# Altium PCB L-D5019-08.PcbDoc
Units mm, origin at the board's own origin, x right, y up, seen from the top; angles counter-clockwise.
Board outline 37 x 36 mm, 2 copper layers (Top Layer, Bottom Layer), stack 1.57 mm thick; 44 components, 30 nets, 136 pads, 23 vias.
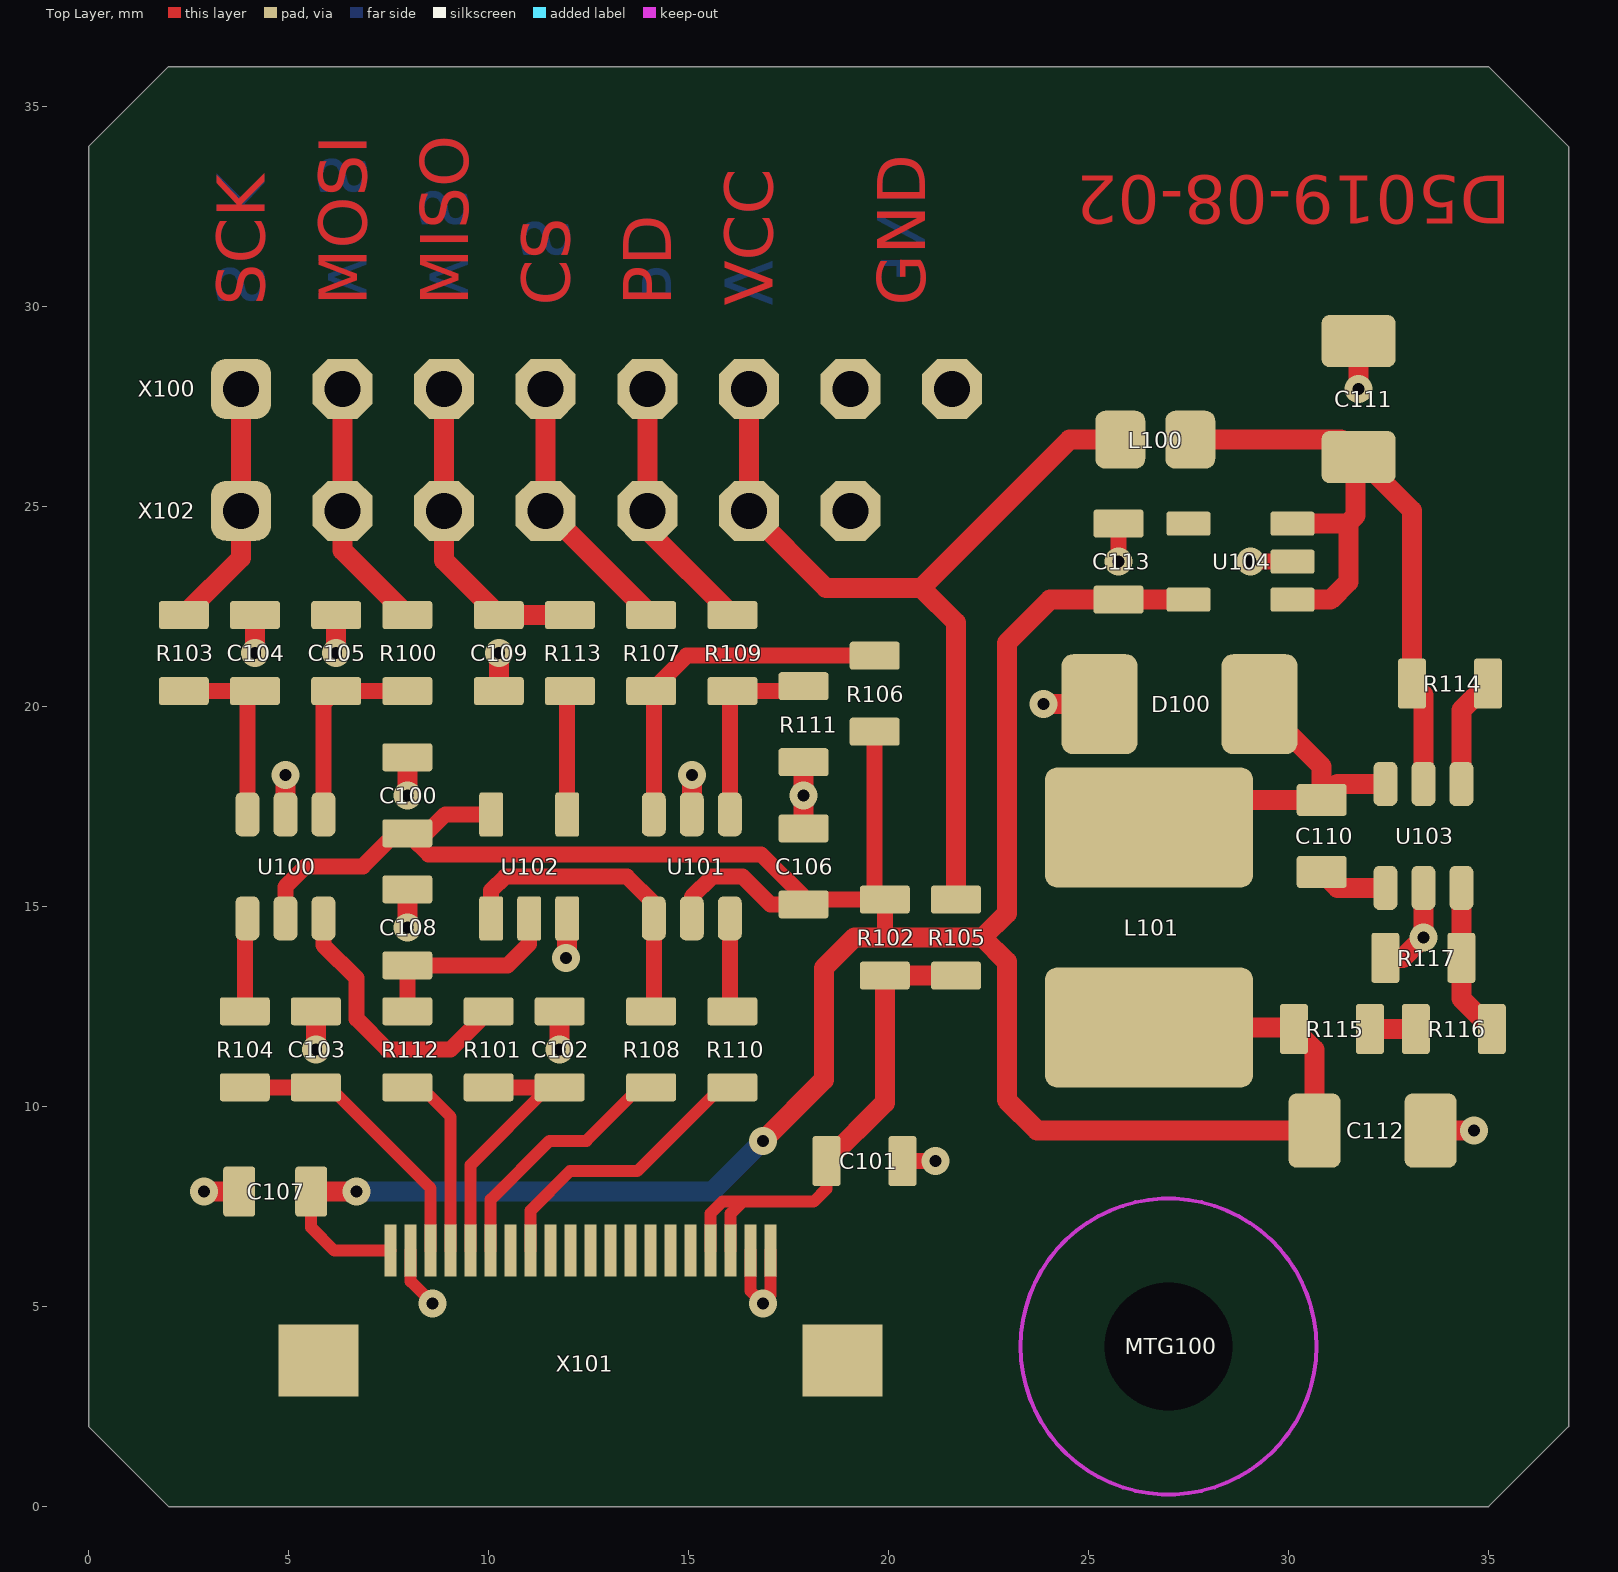
[diagram p0: Top Layer view]
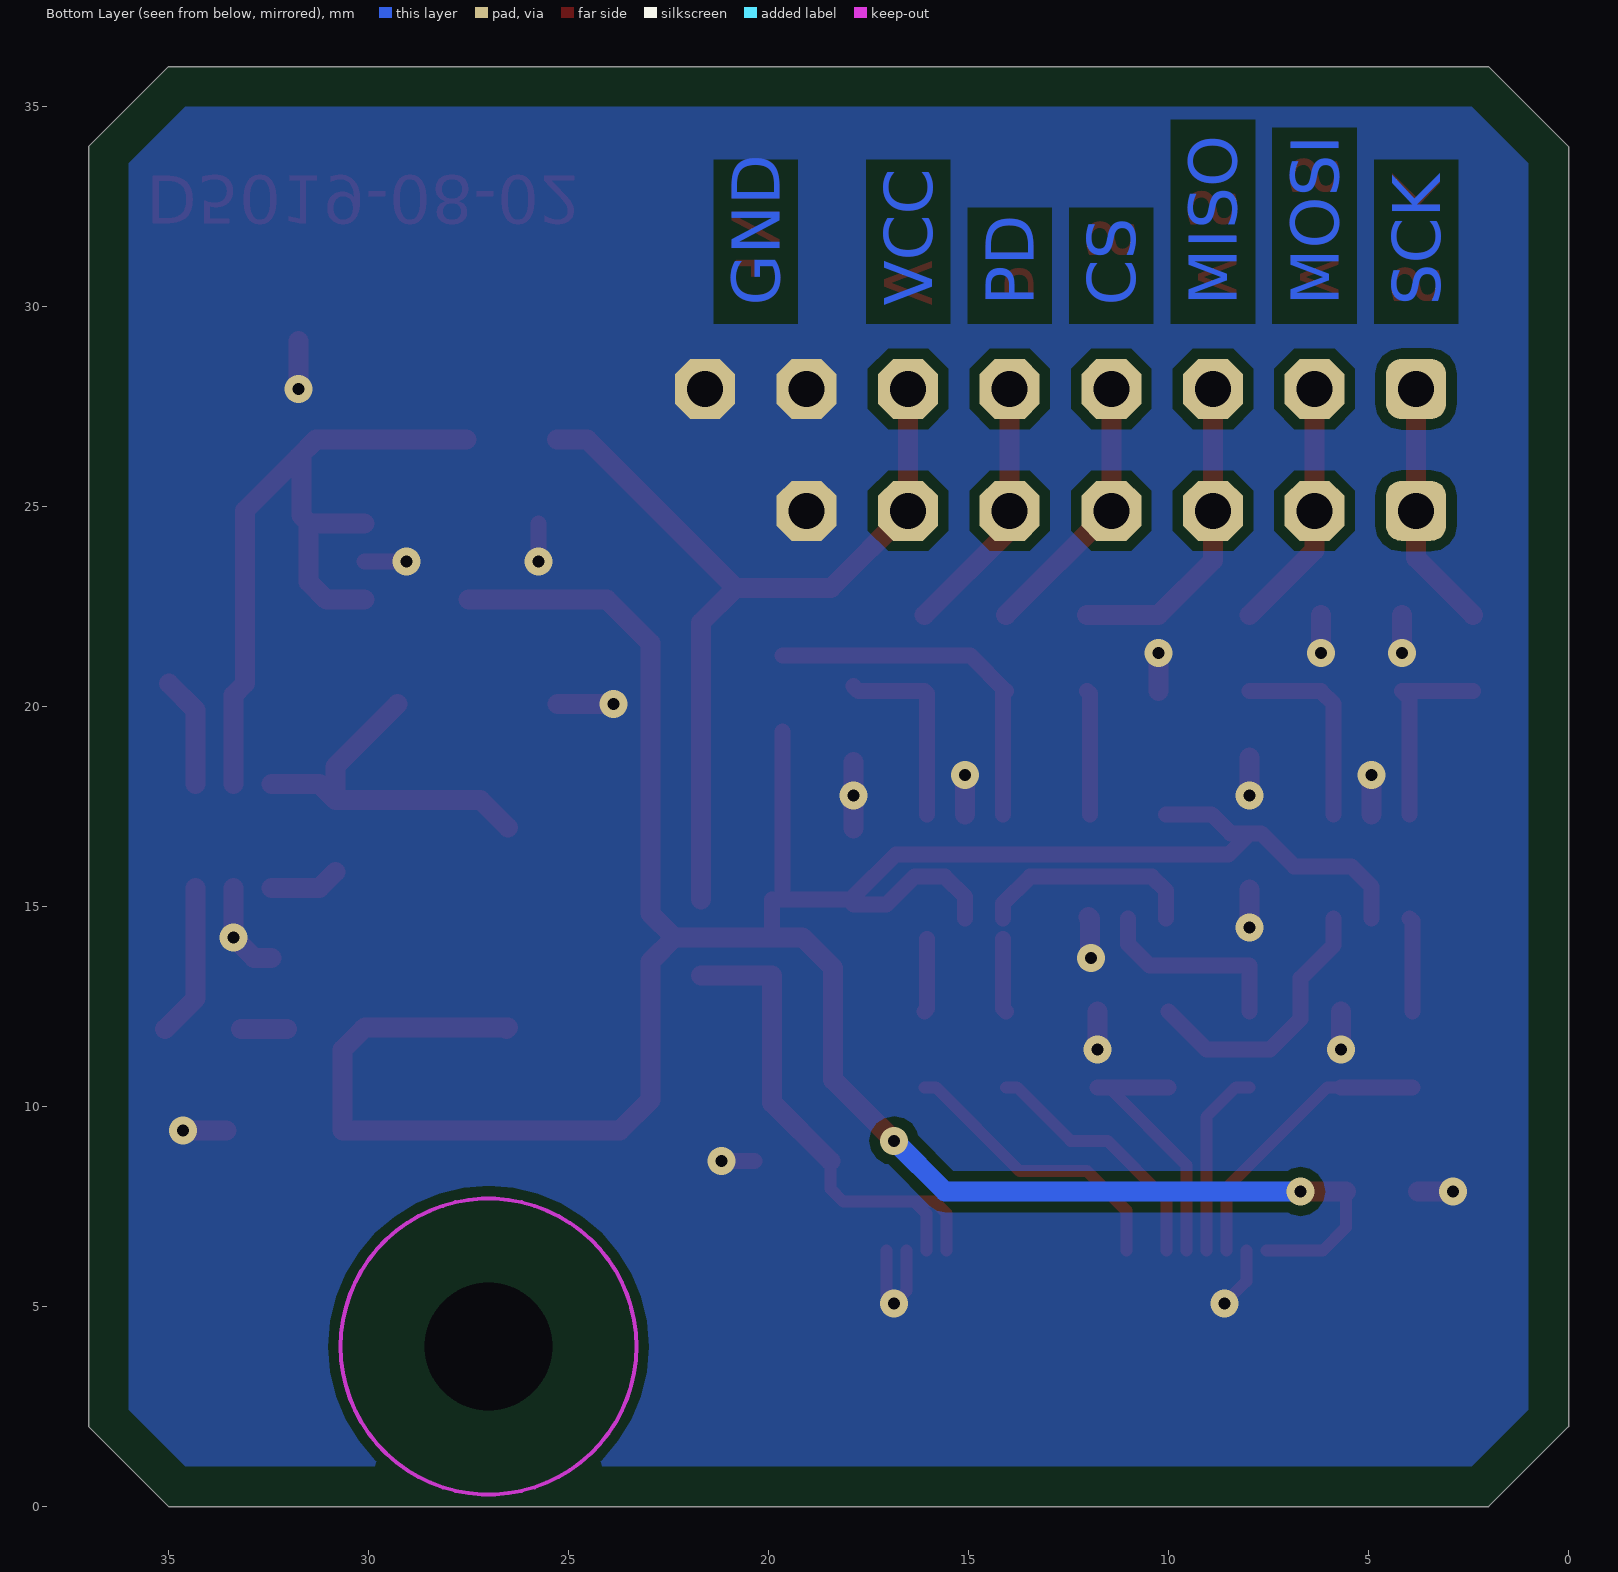
[diagram p1: Bottom Layer view, seen from below]
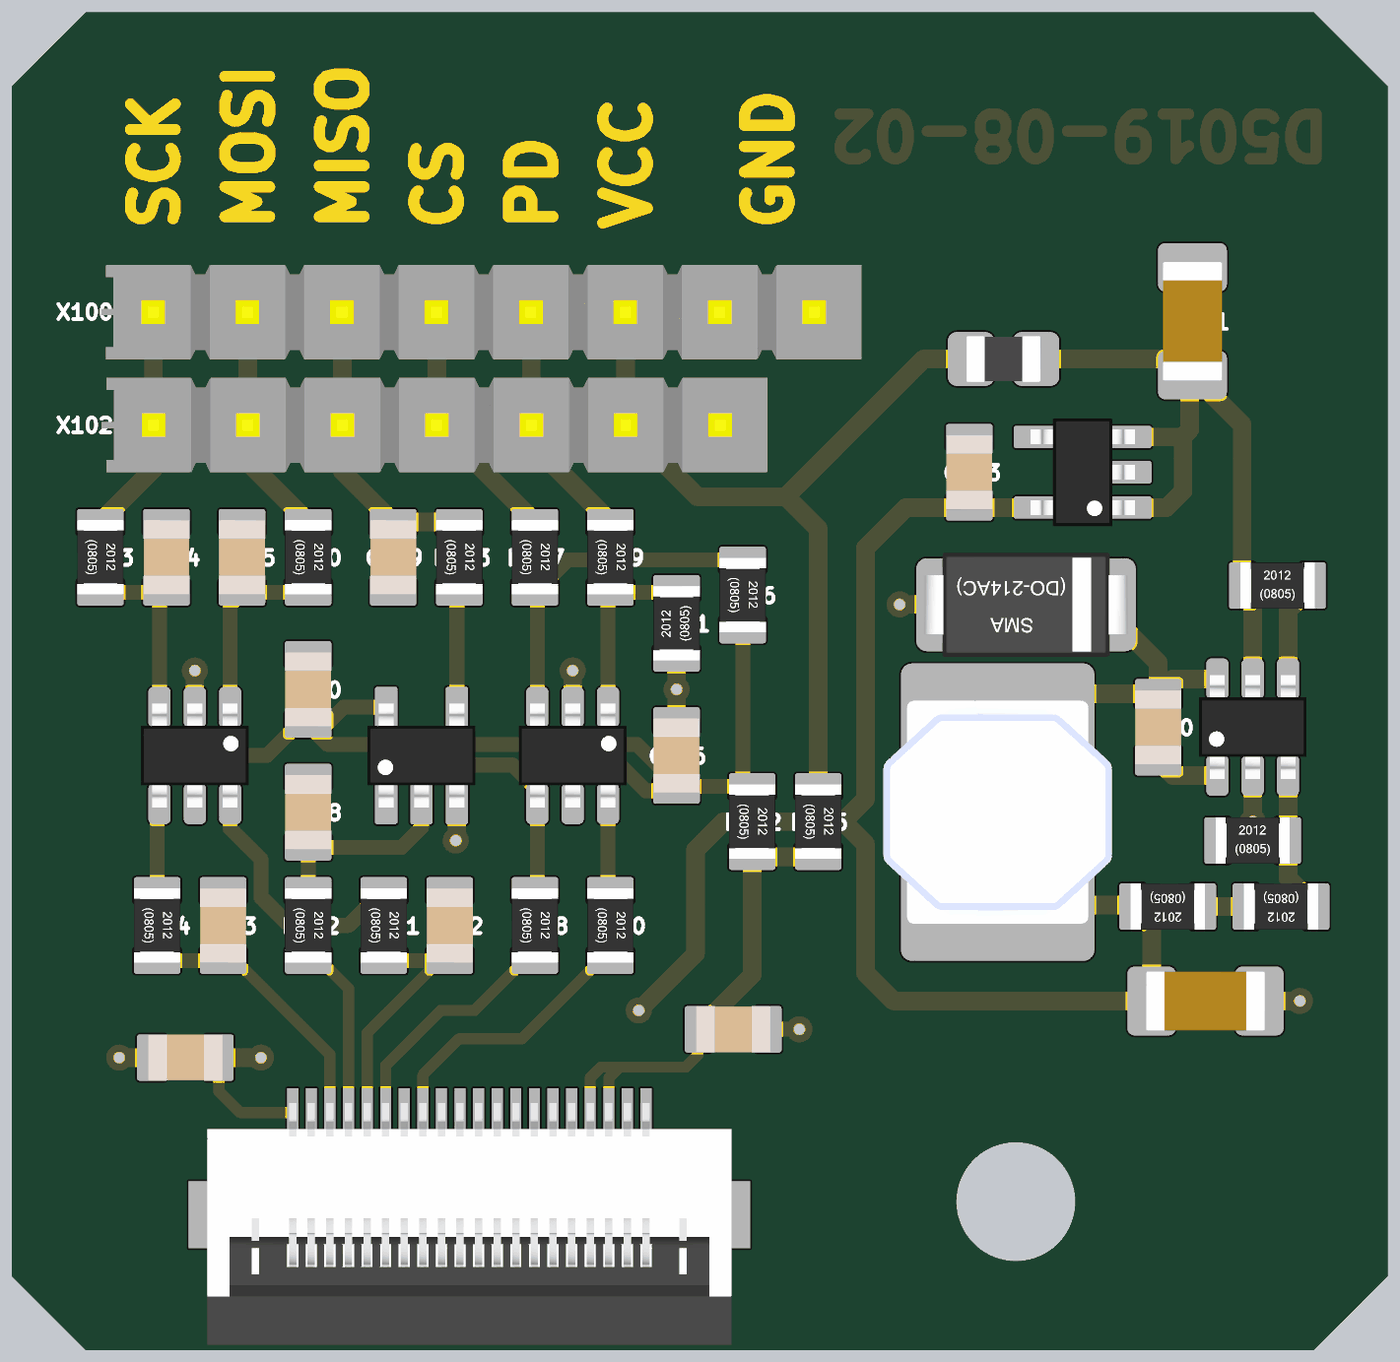
[diagram p2: 3D render of the assembled board from above, using the file's embedded part models]

## Layer stack, top to bottom
Top Solder: solder mask 0.01, Solder Resist, Dk 3.5
Top Layer: signal copper 0.035
Dielectric 1: dielectric 1.5, FR-4, Dk 4.8
Bottom Layer: signal copper 0.035
Bottom Solder: solder mask 0.01, Solder Resist, Dk 3.5

## Board outline
0,2 0,34 2,36 35,36 37,34 37,2 35,0 2,0

## Design rules (kind name [scope] priority, off if disabled: settings)
BoardOutlineClearance [All] p1: gap=1 ignorepadtopadclearanceinfootprint=FALSE except(1.5: THPad-OutlineEdge THPad-CavityEdge THPad-CutoutEdge THPad-SplitBarrior THPad-SplitContinuation)
Clearance 16 [InNet('12V')] p1: gap=0.254 ignorepadtopadclearanceinfootprint=FALSE except(0: Arc-Hole Track-Hole SMDPad-Hole THPad-Hole Via-Hole Fill-Hole Poly-Hole Region-Hole Text-Hole; 0.406: Arc-Poly Track-Poly SMDPad-Poly THPad-Poly Via-Poly Fill-Poly Poly-Poly)
Clearance [All] p2: gap=0.152 ignorepadtopadclearanceinfootprint=FALSE except(0: Arc-Hole Track-Hole SMDPad-Hole THPad-Hole Via-Hole Fill-Hole Poly-Hole Region-Hole Text-Hole; 0.254: Arc-Poly Track-Poly SMDPad-Poly THPad-Poly Via-Poly Fill-Poly Poly-Poly) // 1
HoleSize [All] p1: absolutevalues=TRUE maxlimit=5.08 minlimit=0.3 maxpercent=80.000 minpercent=20.000
MinimumSolderMaskSliver [All] p1: minsoldermaskwidth=0.051
PasteMaskExpansion [All] p1 off: expansion=0
PolygonConnect [All] p1: connectstyle=Direct reliefconductorwidth=0.406 reliefentries=4 polygonreliefangle="90 Angle" airgapwidth=0.254
RoutingVias [All] p1: holewidth=0.3 width=0.6 viastyle="Through Hole" minholewidth=0.3 minwidth=0.6 maxholewidth=4 maxwidth=5
SilkToBoardRegionClearance [All] p1 off:
SilkToSilkClearance [All] p1 off: silktosilkclearance=0.254
SilkToSolderMaskClearance [IsPad] p1 off: minsilkscreentomaskgap=0.254 clearancetoexposedcopper=TRUE
SolderMaskExpansion [All] p1: expansion=0.051 istentingtop=FALSE
Width [All] p1: maxlimit=2.54 minlimit=0.203 preferedwidth=0.406 minimp=50.000000 maximp=50.000000 favimp=50.000000
24 further rules are at their usual default settings.

## Components (designator, comment, footprint, x,y, rotation, side; value= is the part's Value field where it differs from the comment)
C100 "100n" CAPC2012X14L#1 7.97,17.78 r270 top
C101 "4µ7" CAPC2012X14L#1 19.4,8.636 r180 top
C102 "DNP" CAPC2012X14L#1 11.78,11.43 r270 top
C103 "DNP" CAPC2012X14L#1 5.684,11.43 r270 top
C104 "DNP" CAPC2012X14L#1 4.16,21.336 r270 top
C105 "DNP" CAPC2012X14L#1 6.192,21.336 r270 top
C106 "100n" CAPC2012X14L#1 17.876,16.002 r270 top
C107 "4µ7" CAPC2012X14L#2 4.668,7.874 r0 top
C108 "DNP" CAPC2012X14L#1 7.97,14.478 r270 top
C109 "DNP" CAPC2012X14L#1 10.256,21.336 r90 top
C110 "100n" CAPC2012X14L#2 30.83,16.764 r90 top
C111 "4µ7" CAPC3216X19N 31.75,27.686 r270 top
C112 "22µF" CAPC3216X19N 32.1,9.398 r180 top
C113 "4µ7" CAPC2012X14L#1 25.75,23.622 r270 top
D100 "MBRA340T3G‎" DIOM5226X23N 27.274,20.058 r180 top
L100 "0R0" INDC2012X10L 26.67,26.67 r0 top
L101 "NR6028T4R7M" TaiyoYuden_NR6028 26.512,14.478 r270 top
MTG100 "MH_M3" HOLE_3_2MM 27,4 r0 top
R100 "56R" RESC2012X06L 7.97,21.336 r270 top
R101 "56R" RESC2012X06L 10.002,11.43 r270 top
R102 "0R0" RESC2012X06L 19.908,14.224 r270 top
R103 "56R" RESC2012X06L 2.382,21.336 r270 top
R104 "56R" RESC2012X06L 3.906,11.43 r270 top
R105 "DNP" RESC2012X06L 21.686,14.224 r270 top
R106 "10k" RESC2012X06L 19.654,20.32 r270 top
R107 "56R" RESC2012X06L 14.066,21.336 r270 top
R108 "56R" RESC2012X06L 14.066,11.43 r270 top
R109 "56R" RESC2012X06L 16.098,21.336 r270 top
R110 "56R" RESC2012X06L 16.098,11.43 r270 top
R111 "10k" RESC2012X06L 17.876,19.558 r90 top
R112 "56R" RESC2012X06L 7.97,11.43 r270 top
R113 "56R" RESC2012X06L 12.034,21.336 r270 top
R114 "DNP" RESC2012X06L 34.036,20.574 r0 top
R115 "22k" RESC2012X06L 31.084,11.938 r180 top
R116 "10k" RESC2012X06L 34.132,11.938 r180 top
R117 "10k" RESC2012X06L 33.37,13.716 r0 top
U100 "74LVC2G17" SOT95P280X110-6N 4.922,16.002 r270 top
U101 "74LVC2G17" SOT95P280X110-6N 15.082,16.002 r270 top
U102 "74VHC1GT125" SOT95P280X110-5N 11.018,16.002 r90 top
U103 "RT8259GE" SOT95P280X110-6N 33.37,16.764 r90 top
U104 "MIC5504-3.3YM5" SOT95P280X110-5N 28.798,23.622 r180 top
X100 "1x8 2,54mm" PINH_1x08_2_54mm 12.7,27.94 r0 top
X101 "WE_687120149022" WE_687120149022 12.304,3.048 r0 top
X102 "1x7 2,54mm" PINH_1x07_2_54mm 11.43,24.892 r0 top

## Footprints (in the part's own frame and the unit in brackets; to place one, negate y for a bottom-side part, rotate by r counter-clockwise, add the part's x,y. Pads: shape width x height; smd on the part's side, far side on the other; paste and mask are expansions set on the pad)
CAPC2012X14L#1 [mm] "Chip Capacitor, 2-Leads, Body 2,0x1,3mm, IPC High Density"
  rrect20% 0.7x1.25 smd: 1(-0.95,0) 2(0.95,0)
  body extent -1,-0.62 1,0.62, height 0.6
CAPC2012X14L#2 [mm] "Chip Capacitor, 2-Leads, Body 2,0x1,3mm, IPC High Density"
  rrect20% 0.8x1.25 smd: 1(-0.9,0) 2(0.9,0)
  body extent -1,-0.62 1,0.62, height 0.6
CAPC3216X19N [mm] "Chip Capacitor, 2-Leads, Body 3,2x1,6mm, IPC Medium Density"
  rrect30% 1.3x1.85 smd: 1(-1.45,0) 2(1.45,0)
  body extent -1.6,-0.8 1.6,0.8, height 1
DIOM5226X23N [mm] "Molded Diode, 2-Leads, Body 5.2x2.6mm, IPC Medium Density"
  rrect30% 1.9x2.5 smd: 1(-2,0) 2(2,0)
  body extent -2.75,-1.4 2.75,1.4, height 2.6
HOLE_3_2MM [mm] "Mouting-Hole for screws M3 with keepout for washer"
  round 0 hole 3.2 unplated: 1(0,0)
  Keep-Out Layer circle w0.1: c0,0 r3.7
INDC2012X10L [mm] "Ferrite Bead, 2-Leads, Body 2,0x1,3mm, IPC High Density"
  rrect40% 1.25x1.45 smd: 1(-0.875,0) 2(0.875,0)
  body extent -1,-0.62 1,0.62, height 0.85
PINH_1x07_2_54mm [mm] "Pin-Header 7 polig"
  rrect50% 1.5x1.5 hole 0.9: 1(-7.62,0)
  oct 1.5x1.5 hole 0.9: 2(-5.08,0) 3(-2.54,0) 4(0,0) 5(2.54,0) 6(5.08,0) 7(7.62,0)
  body extent -9.02,-1.27 8.89,1.27, height 8.38
PINH_1x08_2_54mm [mm] "Pin-Header 8 polig"
  rrect50% 1.5x1.5 hole 0.9: 1(-8.89,0)
  oct 1.5x1.5 hole 0.9: 2(-6.35,0) 3(-3.81,0) 4(-1.27,0) 5(1.27,0) 6(3.81,0) 7(6.35,0) 8(8.89,0)
  body extent -10.3,-1.28 10.15,1.26, height 8.38
RESC2012X06L [mm] "Chip Resistor, 2-Leads, Body 2,0x1,3mm, IPC High Density"
  rrect20% 0.7x1.25 smd: 1(-0.95,0) 2(0.95,0)
  body extent -1,-0.62 1,0.62, height 0.45
SOT95P280X110-5N [mm] "SOT23, 5-Leads, Body 3,0x3,0mm (max), Pitch 0,95mm, IPC Medium Density"
  rrect20% 1.1x0.6 smd: 1(-1.3,0.95) 2(-1.3,0) 3(-1.3,-0.95) 4(1.3,-0.95) 5(1.3,0.95)
  body extent -1.4,-1.45 1.4,1.45, height 1.45
SOT95P280X110-6N [mm] "SOT23, 6-Leads, Body 3,0x3,0mm (max), Pitch 0,95mm, IPC Medium Density"
  rrect50% 1.1x0.6 smd: 1(-1.3,0.95) 2(-1.3,0) 3(-1.3,-0.95) 4(1.3,-0.95) 5(1.3,0) 6(1.3,0.95)
  body extent -1.4,-1.45 1.4,1.45, height 1.45
TaiyoYuden_NR6028 [mm] "SMD Inductor, 2-Leads, Body 6,0x6.0mm"
  rrect20% 3x5.2 smd: 1(-2.5,0) 2(2.5,0)
  body extent -3,-3.07 3,3.07, height 2.58
WE_687120149022 [mm] "0.50mm SMT ZIF Horizontal Hinge Type Bottom Contact, 20p"
  rect 0.3x1.3 smd: 1(-4.75,3.35) 2(-4.25,3.35) 3(-3.75,3.35) 4(-3.25,3.35) 5(-2.75,3.35) 6(-2.25,3.35) 7(-1.75,3.35) 8(-1.25,3.35) 9(-0.75,3.35) 10(-0.25,3.35) 11(0.25,3.35) 12(0.75,3.35) 13(1.25,3.35) 14(1.75,3.35) 15(2.25,3.35) 16(2.75,3.35) 17(3.25,3.35) 18(3.75,3.35) 19(4.25,3.35) 20(4.75,3.35)
  rect 2x1.8 smd: MH1(-6.55,0.6) MH2(6.55,0.6)
  body extent -7.05,-2.9 7.05,3.6, height 2.25

## Part data
C100 C101 C102 C103 C104 C105 C106 C107 C108 C109 C110 C113: library part CAPC_0805, "0805 Chip Capacitor", PackageDescription=0805, Part Number=CAPC_0805
  C100 C102 C103 C104 C105 C106 C108 C109 C110: Bauteilart=Capacitor, Editor=rriedel, Kategorie=generic, Status=tested, Unterart=unpolarized
  C101 C107 C113: Bauteilart=Kondensator, Ersteller=rriedel, Freigabe=unchecked, ID=894, Kategorie=generisch, Mounting=SMT, Polar=u, timestamp="17.08.2016 13:43:45", Unterart=ungepolt
C111 C112: library part CAPC_1206, "1206 Chip Capacitor", Bauteilart=Capacitor, Editor=rriedel, Kategorie=generic, PackageDescription=1206, Part Number=CAPC_1206, Status=tested, Unterart=unpolarized
D100: "Schottky Gleichrichterdiode, 40V / 3A / 450mV", Manufacturer="ON Semiconductor", Bauteilart=Diode, Date=19.09.2020, Distributor_1=Digi-Key, Distributor_1_Part_Number=MBRA340T3GOSCT-ND, Editor=rriedel, Kategorie=Part, PackageDescription=SMA, Part Number=MBRA340T3G‎, Part_Number_1=MBRA340T3G‎, Status=tested, Unterart=Rectifier
L100: library part INDC_0805, "0805 Chip Inductor", Bauteilart=Inductor, Date=31.03.2019, Editor=rriedel, Kategorie=generic, PackageDescription=0805, Part Number=INDC_0805, Status=tested, Unterart=generic
L101: "4,7µH, shielded, 2,7A, 40mR", Manufacturer="Taiyo Yuden", Bauteilart=Inductor, Date=19.09.2020, Distributor_1=Digi-Key, Distributor_1_Part_Number=587-2100-1-ND, Editor=rriedel, Kategorie=Part, PackageDescription="6x6 mm", Part Number=NR6028T4R7M, Part_Number_1=NR6028T4R7M, Status=tested, Unterart=Power
MTG100: "Mounting-Hole for M3 screws", Bauteilart=Mechanic, Date=13.05.2018, Editor=rriedel, Kategorie=No_Bom, Part Number=MH_M3, Status=tested, Unterart=Holes
R100 R101 R102 R103 R104 R105 R106 R107 R108 R109 R110 R111 R112 R113 R114 R115 R116 R117: library part RESC_0805, "0805 Chip Resistor", Bauteilart=Resistor, Editor=rriedel, Kategorie=generic, PackageDescription=0805, Part Number=RESC_0805, Status=tested, Unterart=generic
U100 U101: "Dual Schmitt-Trigger Buffer with 5.5V tolerant inputs", Manufacturer=TI, Bauteilart=IC, Date=08.05.2020, Distributor_1=Digi-Key, Distributor_1_Part_Number=296-SN74LVC2G17DBVRCT-ND‎, Editor=rriedel, Kategorie=Part, PackageDescription=SOT23-6, Part Number=74LVC2G17, Part_Number_1=74LVC2G17DBVR, Status=tested, Unterart=Logic
U102: "1x Buffer with OE; 3-state,Level Shifter 3,3V to 5V and 5V to 3.3V", Manufacturer="ON Semiconductor", Bauteilart=IC, Date=21.01.2011, Distributor_1=Farnell, Distributor_1_Part_Number=1703291, Editor=rriedel, Kategorie=Part, PackageDescription=SOT23-5, Part Number=74VHC1GT125, Part_Number_1=M74VHC1G125DT1G, Status=tested, Unterart=Logic
U103: "Step-Down DC/DC Regulator, 24V, 1.2A, 1,4MHz", Manufacturer=Richtek, Bauteilart=IC, Date=31.03.2019, Distributor_1=Digi-Key, Distributor_1_Part_Number=1028-1497-1-ND, Editor=rriedel, Kategorie=Part, PackageDescription=SOT23-6, Part Number=RT8259GE, Part_Number_1=RT8259GE, Status=tested, Unterart=Switching-Regulators
U104: "300 mA LDO,  Vin=2,5V…5,5V, Vout= 3,3V, -40°C..125°C", Manufacturer=Microchip, Bauteilart=IC, Date=23.05.2019, Distributor_1=Farnell, Distributor_1_Part_Number=2510377, Editor=rriedel, Kategorie=Part, PackageDescription=SOT23-5, Part Number=MIC5504-3.3YM5, Part_Number_1=MIC5504-3.3YM5, Status=tested, Unterart=Linear-Regulators
X100: library part PINH_1x8_2_54, "Pin-Header 2,54 mm 8pins", Bauteilart=Connector, Date=07.02.2017, Editor=rriedel, Kategorie=generic, Part Number=PINH_1x8_2_54, Status=tested, Unterart=Pin-Header
X101: "20pin WR-FPC 0.50 mm SMT ZIF Horizontal - Bottom Contact", Manufacturer=Wuerth, Bauteilart=Connector, Date=25.05.2020, Distributor_1=Digi-Key, Distributor_1_Part_Number=732-6002-1-ND, Editor=rriedel, Kategorie=Part, PackageDescription="FPC 0.5mm", Part Number=WE_687120149022, Part_Number_1=6.8712014902e+011, Status=tested, Unterart=FPC
X102: library part PINH_1x7_2_54, "Pin-Header 2,54 mm 7pins", Bauteilart=Connector, Date=07.02.2017, Editor=rriedel, Kategorie=generic, Part Number=PINH_1x7_2_54, Status=tested, Unterart=Pin-Header

## Via types
v1: diameter 0.7, hole 0.3, Top Layer to Bottom Layer, tented both sides, 23 vias

## Nets (pads, with @x,y where several pads share a name; then routed paths per layer and width w, separated by ;. In a path a pad name is that pad's centre, name@x,y a point inside that pad or via, vN(x,y) a via of type N, cw(c..) or ccw(c..) an arc to the next point about the centre after c; other vN are vias at no path point)
3V3: C100.2 C106.2 C107.2 C112.2 C113.2 L101.2 R102.1 R106.2 R115.2 U100.5 U101.5 U102.5 U104.5 X101.1 | length 83.9
  Top Layer w0.3: C107.2 5.568,6.974 6.144,6.398 X101.1
  Top Layer w0.4: U100.5 4.922,15.494 5.43,16.002 6.858,16.002 7.686,16.83 C100.2 8.448,16.83 8.92,17.302 U102.5 ; C100.2@8.082,16.718 8.5,16.3 16.816,16.3 17.876,15.24 C106.2 ; U101.5 15.082,15.24 15.59,15.748 16.352,15.748 17.048,15.052 C106.2 ; R106.2 R102.1@19.654,15.174 ; 19.908,14.224 R102.1 R102.1@19.654,15.174 ; C106.2 17.998,15.174 R102.1@19.654,15.174
  Top Layer w0.5: C107.2 v1(6.7,7.874) ; v1(16.86,9.144) 18.384,10.668 18.384,13.462 19.146,14.224 19.908,14.224 22.352,14.224 ; L101.2@26.552,11.938 L101.2 30.094,11.978 R115.2 30.65,11.422 C112.2 23.718,9.398 22.956,10.16 22.956,13.62 22.352,14.224 ; U104.5 C113.2 24.038,22.672 22.956,21.59 22.956,14.828 22.352,14.224
  Bottom Layer w0.5: v1(6.7,7.874) 15.59,7.874 v1(16.86,9.144)
CS_TFT_3V3: R108.2 X101.6 | length 6.4
  Top Layer w0.3: X101.6 10.054,7.672 11.526,9.144 12.446,9.144 13.782,10.48 R108.2
GND: C100.1 C101.1 C102.1 C103.1 C104.1 C105.1 C106.1 C107.1 C108.1 C109.1 C111.1 C112.1 C113.1 D100.2 R111.1 R117.1 U100.2 U101.2 U102.3 U103.2 U104.2 X100.7 X100.8 X101.2 X101.19 X101.20 X102.7 | length 25.5
  Top Layer w0.3: X101.2 8.054,5.631 v1(8.605,5.08) ; X101.19 16.554,5.386 v1(16.86,5.08) 17.054,5.274 X101.20
  Top Layer w0.4: C101.1 v1(21.178,8.636) ; v1(25.75,23.622) C113.1 ; v1(29.052,23.622) U104.2
  Top Layer w0.5: v1(2.89,7.874) C107.1 ; v1(4.16,21.336) C104.1 ; U100.2 v1(4.922,18.288) ; v1(5.684,11.43) C103.1 ; v1(6.192,21.336) C105.1 ; v1(7.97,14.478) C108.1 ; v1(7.97,17.78) C100.1 ; C109.1 v1(10.256,21.336) ; v1(11.78,11.43) C102.1 ; v1(11.938,13.716) 11.968,13.746 U102.3 U102.3@11.998,14.732 ; U101.2 v1(15.082,18.288) ; C106.1 v1(17.876,17.78) R111.1 ; v1(23.876,20.066) 25.266,20.066 D100.2 ; v1(31.75,27.94) C111.1 ; R117.1 32.862,13.716 v1(33.37,14.224) U103.2 ; C112.1 v1(34.64,9.398)
MISO_3V3: R112.2 X101.4 | length 4.7
  Top Layer w0.3: R112.2 8.316,10.48 9.054,9.742 X101.4
MOSI_3V3: C102.2 R101.2 X101.5 | length 6.9
  Top Layer w0.3: X101.5 9.554,8.538 11.496,10.48 C102.2
  Top Layer w0.4: R101.2 C102.2
NetC101_2: C101.2 R102.2 R105.2 X101.17 X101.18 | length 13.1
  Top Layer w0.3: X101.17 15.554,7.33 15.844,7.62 16.352,7.62 ; X101.18 16.054,7.322 16.352,7.62 ; C101.2 18.45,7.94 18.13,7.62 16.352,7.62
  Top Layer w0.5: C101.2 19.908,10.094 R102.2 R105.2
NetC104_2: C104.2 R103.2 U100.3 | length 4.9
  Top Layer w0.4: R103.2 C104.2 3.972,20.198 U100.3
NetC105_2: C105.2 R100.2 U100.1 | length 5
  Top Layer w0.4: U100.1 5.872,20.066 C105.2 R100.2
NetC108_2: C108.2 R112.1 U102.2 | length 5.1
  Top Layer w0.4: R112.1 C108.2 10.48,13.528 11.018,14.066 U102.2
NetC110_1: C110.1 U103.1 | length 1.8
  Top Layer w0.5: C110.1 31.23,15.464 U103.1
NetC110_2: C110.2 D100.1 L101.1 U103.6 | length 9.4
  Top Layer w0.5: L101.1 27.198,17.664 C110.2 ; D100.1 30.83,18.502 C110.2 ; U103.6 31.23,18.064 C110.2
NetC111_2: C111.2 L100.2 R114.1 U103.5 U104.1 U104.3 | length 19.4
  Top Layer w0.5: L100.2 31.316,26.67 C111.2 ; U104.1 31.054,22.672 31.496,23.114 31.496,24.554 31.478,24.572 ; U104.3 31.478,24.572 ; U103.5 33.37,20.29 R114.1 33.086,24.9 C111.2 ; 31.478,24.572 31.676,24.77 31.676,26.162 C111.2
NetR101_1: R101.1 U100.6 | length 6.9
  Top Layer w0.4: U100.6 5.872,14.036 6.7,13.208 6.7,12.192 7.462,11.43 9.052,11.43 R101.1
NetR104_1: R104.1 U100.4 | length 2.3
  Top Layer w0.4: R104.1 3.906,14.636 U100.4
NetR106_1: R106.1 R107.2 U101.3 | length 9.1
  Top Layer w0.4: U101.3 14.132,20.32 R107.2 14.95,21.27 R106.1
NetR108_1: R108.1 U101.4 U102.1 | length 7.4
  Top Layer w0.4: U102.1 10.068,15.402 10.414,15.748 13.462,15.748 14.132,15.078 U101.4 ; R108.1 14.132,12.446 U101.4@14.132,14.194
NetR109_2: R109.2 R111.2 U101.1 | length 4.9
  Top Layer w0.4: U101.1 16.032,20.32 R109.2 17.754,20.386 R111.2
NetR110_1: R110.1 U101.6 | length 1.8
  Top Layer w0.4: U101.6@16.032,14.194 16.032,12.446 R110.1
NetR113_2: R113.2 U102.4 | length 3.1
  Top Layer w0.4: U102.4 11.968,20.32 R113.2
NetR114_2: R114.2 U103.4 | length 2.8
  Top Layer w0.5: U103.4 34.32,19.908 R114.2
NetR115_1: R115.1 R116.2 | length 1.1
  Top Layer w0.5: R115.1 R116.2
NetR116_1: R116.1 R117.2 U103.3 | length 3.8
  Top Layer w0.5: U103.3 R117.2 34.32,12.7 R116.1
PD_TFT_3V3: R110.2 X101.8 | length 7.3
  Top Layer w0.3: X101.8 11.054,7.402 12.034,8.382 13.716,8.382 15.814,10.48 R110.2
SCK_3V3: C103.2 R104.2 X101.3 | length 7.3
  Top Layer w0.3: C103.2 6.03,10.48 8.554,7.956 X101.3
  Top Layer w0.4: R104.2 C103.2
VCC: L100.1 R105.1 X100.6 X102.6 | length 22.3
  Top Layer w0.5: X100.6 X102.6 18.438,22.964 20.82,22.964 ; R105.1 21.686,22.098 20.82,22.964 ; L100.1@25.287,26.67 24.525,26.67 20.82,22.964
X_CS_TFT: R107.1 X100.4 X102.4 | length 6.8
  Top Layer w0.5: X100.4 X102.4 11.46,24.892 R107.1
X_MISO: C109.2 R113.1 X100.3 X102.3 | length 8
  Top Layer w0.5: X100.3 X102.3 8.89,23.652 C109.2 R113.1
X_MOSI: R100.1 X100.2 X102.2 | length 6.3
  Top Layer w0.5: X100.2 X102.2 6.35,23.906 R100.1
X_PD_TFT: R109.1 X100.5 X102.5 | length 6.5
  Top Layer w0.5: X100.5 X102.5 13.97,24.414 R109.1
X_SCK: R103.1 X100.1 X102.1 | length 6.2
  Top Layer w0.5: R103.1 3.81,23.714 X102.1 X100.1
pads on no net: MTG100.1 U104.4 X101.7 X101.9 X101.10 X101.11 X101.12 X101.13 X101.14 X101.15 X101.16 X101.MH1 X101.MH2

## Polygon pours and split planes (outlines as drawn)
GND on Bottom Layer "GND_L02_P000" (solid, remove dead copper, pour order 0): 0,36 0,0.254 40,0.254 40,36

## Other copper
Top Layer:
  text "D5019-08-02" at 35.56,33.274 h1.2 r180
  text "SCK" at 4.41,30.018 h1.2 r90
  text "MOSI" at 6.95,30.018 h1.2 r90
  text "MISO" at 9.49,30.018 h1.2 r90
  text "CS" at 12.03,30.018 h1.2 r90
  text "PD" at 14.57,30.018 h1.2 r90
  text "VCC" at 17.11,30.018 h1.2 r90
  text "GND" at 20.92,30.018 h1.2 r90
Bottom Layer:
  text "SCK" at 3.21,30.018 h1.2 r270
  text "MOSI" at 5.75,30.018 h1.2 r270
  text "MISO" at 8.29,30.018 h1.2 r270
  text "CS" at 10.83,30.018 h1.2 r270
  text "PD" at 13.37,30.018 h1.2 r270
  text "VCC" at 15.91,30.018 h1.2 r270
  text "GND" at 19.72,30.018 h1.2 r270

## Silkscreen, mask and mechanical layers (free items; w line width, h text height)
Top Solder:
  text "SCK" at 4.41,30.018 h1.2 r90
  text "MOSI" at 6.95,30.018 h1.2 r90
  text "MISO" at 9.49,30.018 h1.2 r90
  text "CS" at 12.03,30.018 h1.2 r90
  text "PD" at 14.57,30.018 h1.2 r90
  text "VCC" at 17.11,30.018 h1.2 r90
  text "GND" at 20.92,30.018 h1.2 r90
Bottom Solder:
  text "SCK" at 3.21,30.018 h1.2 r270
  text "MOSI" at 5.75,30.018 h1.2 r270
  text "MISO" at 8.29,30.018 h1.2 r270
  text "CS" at 10.83,30.018 h1.2 r270
  text "PD" at 13.37,30.018 h1.2 r270
  text "VCC" at 15.91,30.018 h1.2 r270
  text "GND" at 19.72,30.018 h1.2 r270
M1_Dimension:
  the board outline again, w0.254

## Dimensions
2,36 to 35,0 on M2_Measures
0,34 to 37,34 on M2_Measures